# Altium PCB Mic.PcbDoc
Units mil, origin at the board's own origin, x right, y up, seen from the top; angles counter-clockwise.
Board outline 1195 x 645 mil, 2 copper layers (Top Layer, Bottom Layer); 11 components, 8 nets, 34 pads, 7 vias.
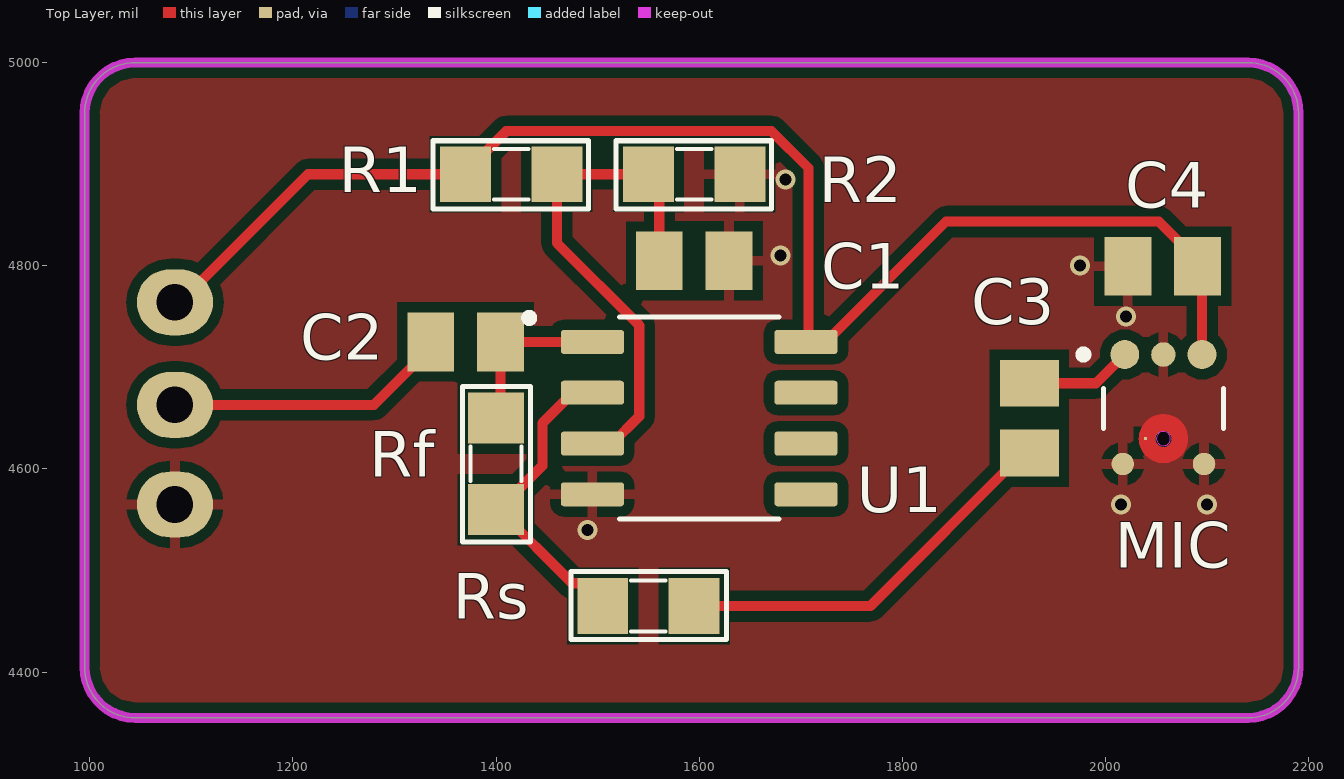
[diagram p0: Top Layer view]
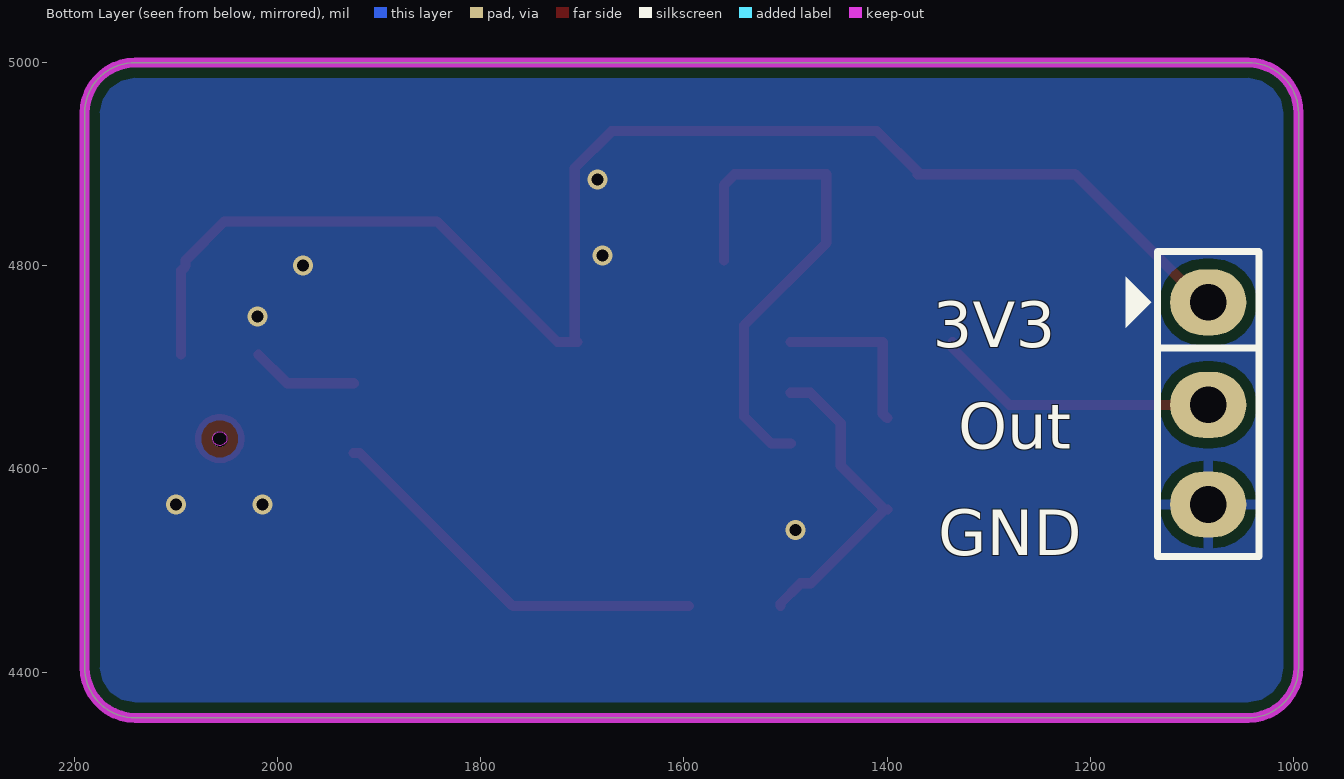
[diagram p1: Bottom Layer view, seen from below]
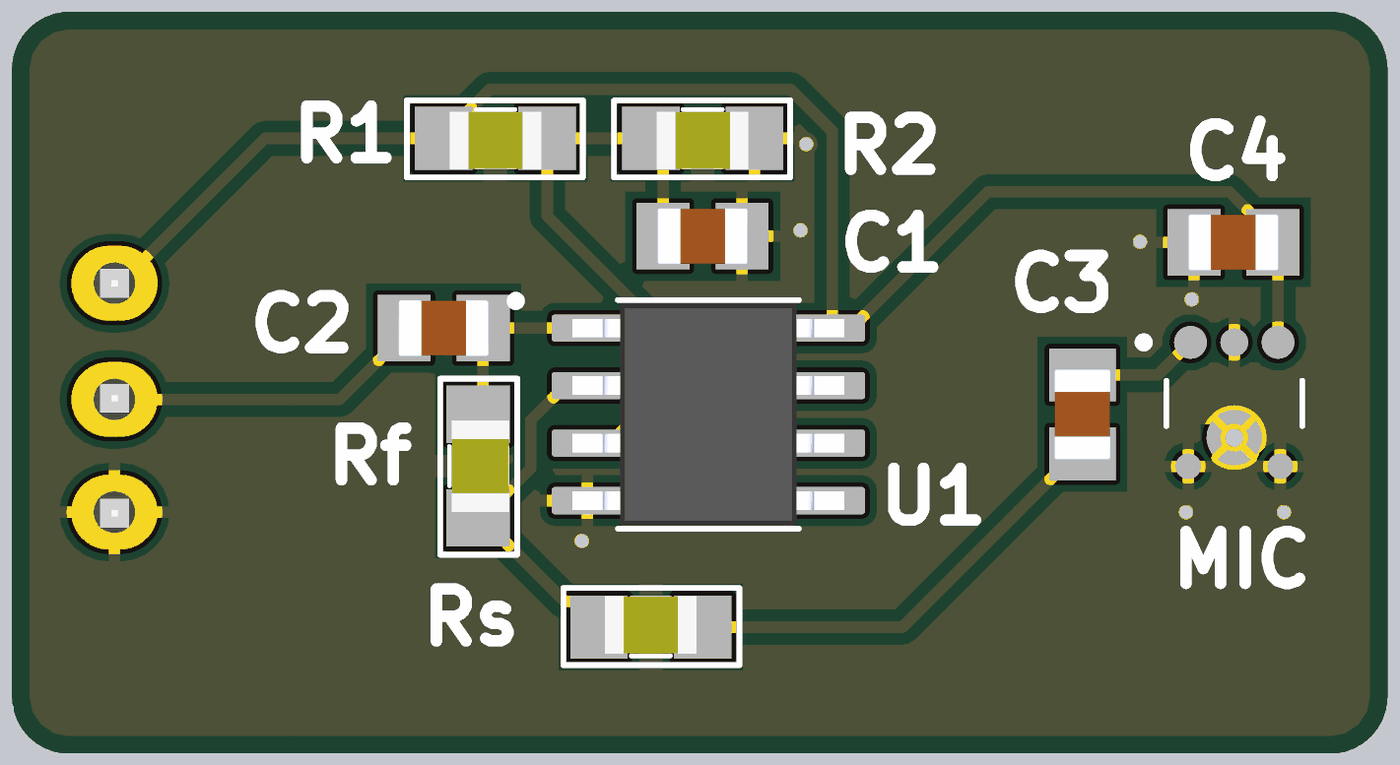
[diagram p2: 3D render of the assembled board from above, using the file's embedded part models]

## Layer stack, top to bottom
Top Solder: solder mask 0.4, Solder Resist, Dk 3.5
Top Layer: signal copper 1.4
Dielectric 1: dielectric 12.6, FR-4, Dk 4.8
Bottom Layer: signal copper 1.4
Bottom Solder: solder mask 0.4, Solder Resist, Dk 3.5

## Board outline
995,4405 995,4950 cw(c1045,4950) 1045,5000 2140,5000 cw(c2140,4950) 2190,4950 2190,4405 cw(c2140,4405) 2140,4355 1045,4355 cw(c1045,4405)

## Design rules (kind name [scope] priority, off if disabled: settings)
Clearance [All] p1: gap=10 ignorepadtopadclearanceinfootprint=FALSE
PolygonConnect [All] p1: connectstyle=Relief reliefconductorwidth=10 reliefentries=4 polygonreliefangle="90 Angle" airgapwidth=10
RoutingVias [All] p1: holewidth=28 width=50 viastyle="Through Hole" minholewidth=10 minwidth=10 maxholewidth=28 maxwidth=50
SolderMaskExpansion [All] p1: expansion=4 istentingtop=FALSE
Width [All] p1: maxlimit=10 minlimit=10 preferedwidth=10
30 further rules are at their usual default settings.

## Classes and differential pairs
component class Sheet1: C1 C2 C3 R1 R2 U1

## Components (designator, comment, footprint, x,y, rotation, side; value= is the part's Value field where it differs from the comment)
C1 "100nF" CAPC2012X145N 1595,4805 r180 top
C2 "100nF" CAPC2012X145N 1370,4725 r0 top
C3 "100nF" CAPC2012X145N 1925,4650 r90 top
C4 "100nF" CAPC2012X145N 2056.19,4799.58 r0 top
J1 "Jumper 3" JP3 1084,4664 r270 bottom value=J3
MIC "SPU0410LR5H-QB-7" "MIC_SPU0410LR5H-QB-7 - duplicate" 2056.9,4659.58 r0 top
R1 "10K" SM-0805 1415,4890 r0 top value=1K
R2 "10K" SM-0805 1595,4890 r0 top value=1K
Rf "47K" SM-0805 1400,4605 r90 top value=1K
Rs "1K" SM-0805 1550,4465 r180 top
U1 "MCP6022-I/SN" SOIC127P599X175-8N 1600,4650 r0 top

## Footprints (in the part's own frame and the unit in brackets; to place one, negate y for a bottom-side part, rotate by r counter-clockwise, add the part's x,y. Pads: shape width x height; smd on the part's side, far side on the other; paste and mask are expansions set on the pad)
CAPC2012X145N [mm]
  rect 1.17x1.47 smd: 1(-0.871,0) 2(0.871,0)
  body extent -1,-0.63 1,0.63, height 1.45
JP3 [mil] "Jumper 3"
  oval 65x75 hole 36: 1(-100,0) 2(1,0) 3(99,0)
  silkscreen extent -150,-81 150,50, body extent -150,-60 150,55, height 355
"MIC_SPU0410LR5H-QB-7 - duplicate" [mm]
  round 0.723 smd: 1(-0.966,1.347) 4(0.966,1.347)
  round 0.562 smd: 2(-1.015,-1.39) 3(1.015,-1.39)
  round 0.612 smd: 5(0,1.347)
  rect 0.08x0.08 smd paste-1 mask+0: 6(-0.45,-0.756)
  round 0.4 hole 0.4 unplated: ""(0,-0.762)
  Top Layer region: 0.064,-0.147 0.127,-0.157 0.189,-0.174 0.249,-0.197 0.306,-0.226 0.36,-0.261 0.41,-0.301 0.455,-0.346 0.495,-0.396 0.53,-0.45 0.559,-0.507 0.582,-0.567 0.599,-0.629 0.609,-0.692 0.612,-0.756 0.609,-0.82 0.599,-0.883 0.582,-0.945 0.559,-1.005 0.53,-1.062 0.495,-1.116 0.455,-1.166 0.41,-1.211 0.36,-1.251 0.306,-1.286 0.249,-1.315 0.189,-1.338 0.127,-1.355 0.064,-1.365 0,-1.368 -0.064,-1.365 -0.127,-1.355 -0.189,-1.338 -0.249,-1.315 -0.306,-1.286 -0.36,-1.251 -0.41,-1.211 -0.455,-1.166 -0.495,-1.116 -0.53,-1.062 -0.559,-1.005 -0.582,-0.945 -0.599,-0.883 -0.609,-0.82 -0.612,-0.756 -0.609,-0.692 -0.599,-0.629 -0.582,-0.567 -0.559,-0.507 -0.53,-0.45 -0.495,-0.396 -0.455,-0.346 -0.41,-0.301 -0.36,-0.261 -0.306,-0.226 -0.249,-0.197 -0.189,-0.174 -0.127,-0.157 -0.064,-0.147 0,-0.144
  Keep-Out Layer circle w0.003: c0,-0.756 r0.175
  silkscreen extent -2.1,-0.5 1.5,1.45
SM-0805 [mil] "Compoment SMD 80x50mil"
  rect 50x55 smd: 1(-45,0) 2(45,0)
  silkscreen extent -77,-34 76,33, body extent -40,-27 40,23, height 24
SOIC127P599X175-8N [mm]
  rrect25% 1.58x0.6 smd: 1(-2.67,1.905) 2(-2.67,0.635) 3(-2.67,-0.635) 4(-2.67,-1.905) 5(2.67,-1.905) 6(2.67,-0.635) 7(2.67,0.635) 8(2.67,1.905)
  silkscreen extent -4.35,-2.52 1.99,2.6, body extent -3,-2.45 3,2.45, height 1.75

## Part data
C1 C2 C3 C4: library part VJ0805A390GXCAP, "39 pF Â±2% 200V Ceramic Capacitor C0G, NP0 0805 (2012 Metric)", Package="2012 Vishay Vitramon", Check_prices=https://www.snapeda.com/parts/VJ0805A390GXCAP/Vishay/view-part/?ref=eda, MF="Vishay Vitramon", MP=VJ0805A390GXCAP, SnapEDA_Link=https://www.snapeda.com/parts/VJ0805A390GXCAP/Vishay/view-part/?ref=snap
J1: library part JP3
MIC: "100Hz ~ 80kHz Analog Microphone MEMS _Silicon_ 1.5V ~ 3.6V Omnidirectional _-38dB Â±3dB @ 94dB SPL_ Solder Pads", Package="2225 Knowles", Availability=Unavailable, MF=Knowles, MP=SPU0410LR5H-QB-7, Price=None, SnapEDA_Link=https://www.snapeda.com/parts/SPU0410LR5H-QB-7/Knowles/view-part/587749/?ref=snap
R1 R2 Rf Rs: library part RM, "Resistor SMD"
U1: "Microchip MCP6022-I/SN,Dual Op Amp,10MHz CMOS,Rail to Rail,3V,5V,8-Pin SOIC", Package="SO-8 Microchip", Check_prices=https://www.snapeda.com/parts/MCP6022-I/SN/Microchip/view-part/?ref=eda, MF=Microchip, MP=MCP6022-I/SN, SnapEDA_Link=https://www.snapeda.com/parts/MCP6022-I/SN/Microchip/view-part/?ref=snap

## Via types
v1: diameter 19.68, hole 11.81, Top Layer to Bottom Layer, tented top, 7 vias

## Nets (pads, with @x,y where several pads share a name; then routed paths per layer and width w, separated by ;. In a path a pad name is that pad's centre, name@x,y a point inside that pad or via, vN(x,y) a via of type N, cw(c..) or ccw(c..) an arc to the next point about the centre after c; other vN are vias at no path point)
+3V3: C4.2 J1.1 MIC.4 R1.1 U1.8 | length 1426.9
  Top Layer w10: J1.1 1089,4764 1215,4890 R1.1 1370,4892.5 1410,4932.5 1671.21,4932.5 1707.5,4896.21 1707.5,4727.38 U1.8 1724.41,4725 1842.93,4843.52 2052.45,4843.52 2090.48,4805.49 C4.2 2094.93,4795.14 MIC.4
GND: C1.1 C4.1 J1.3 MIC.2 MIC.3 MIC.5 MIC.6 R2.2 U1.4
  other v1: 1490,4540 2015,4565 2100,4565 2020,4750 1975,4800 1680,4810 1685,4885
NetC1_2: C1.2 R1.2 R2.1 U1.3 | length 508.4
  Top Layer w10: U1.3 1514.17,4625 1540.98,4651.81 1540.98,4741.29 1460,4822.28 R1.2 R2.1 1560.71,4879.29 C1.2
NetC2_1: C2.1 J1.2 | length 280.8
  Top Layer w10: J1.2 1279.61,4663 1335.71,4719.09 C2.1
NetC2_2: C2.2 Rf.2 U1.1 | length 167.4
  Top Layer w10: Rf.2 1404.29,4654.29 C2.2 U1.1
NetC3_1: C3.1 Rs.1 | length 392.4
  Top Layer w10: Rs.1 1768.39,4465 1919.09,4615.71 C3.1
NetC3_2: C3.2 MIC.1 | length 105.6
  Top Layer w10: C3.2 1990.54,4684.29 MIC.1
NetRf_1: Rf.1 Rs.2 U1.2 | length 310.4
  Top Layer w10: Rf.1 Rf.1@1402.5,4560 ; U1.2 1475.59,4675 1445.64,4645.05 1445.64,4603.14 Rf.1@1402.5,4560 ; Rs.2 1505,4467.5 1485,4487.5 1475,4487.5 Rf.1@1402.5,4560
pads on no net: MIC. U1.5 U1.6 U1.7

## Polygon pours and split planes (outlines as drawn)
GND on Bottom Layer "NONET_L-01_P-001" (solid, pour order 0): 1005,4990 1010,4995 2190,4995 2190,4385 2120,4315 2090,4345 990,4345 990,4980 1010,5000
GND on Top Layer "NONET_L-01_P-001" (solid, pour order 1): 2190,5010 2190,4370 2180,4360 990,4360 990,5010

## Keep-outs
Keep-Out Layer:
  the board outline again, w10

## Silkscreen, mask and mechanical layers (free items; w line width, h text height)
Bottom Overlay:
  text "3V3" at 1355,4720 h45
  text "Out" at 1329.95,4620 h45
  text "GND" at 1349.95,4515 h45